# Altium PCB FruitBox_LED.PcbDoc
Units mm, origin at the board's own origin, x right, y up, seen from the top; angles counter-clockwise.
Board outline 79.93 x 79.95 mm, 2 copper layers (Top Layer, Bottom Layer), stack 1.534 mm thick; 64 components, 53 nets, 188 pads, 240 vias.
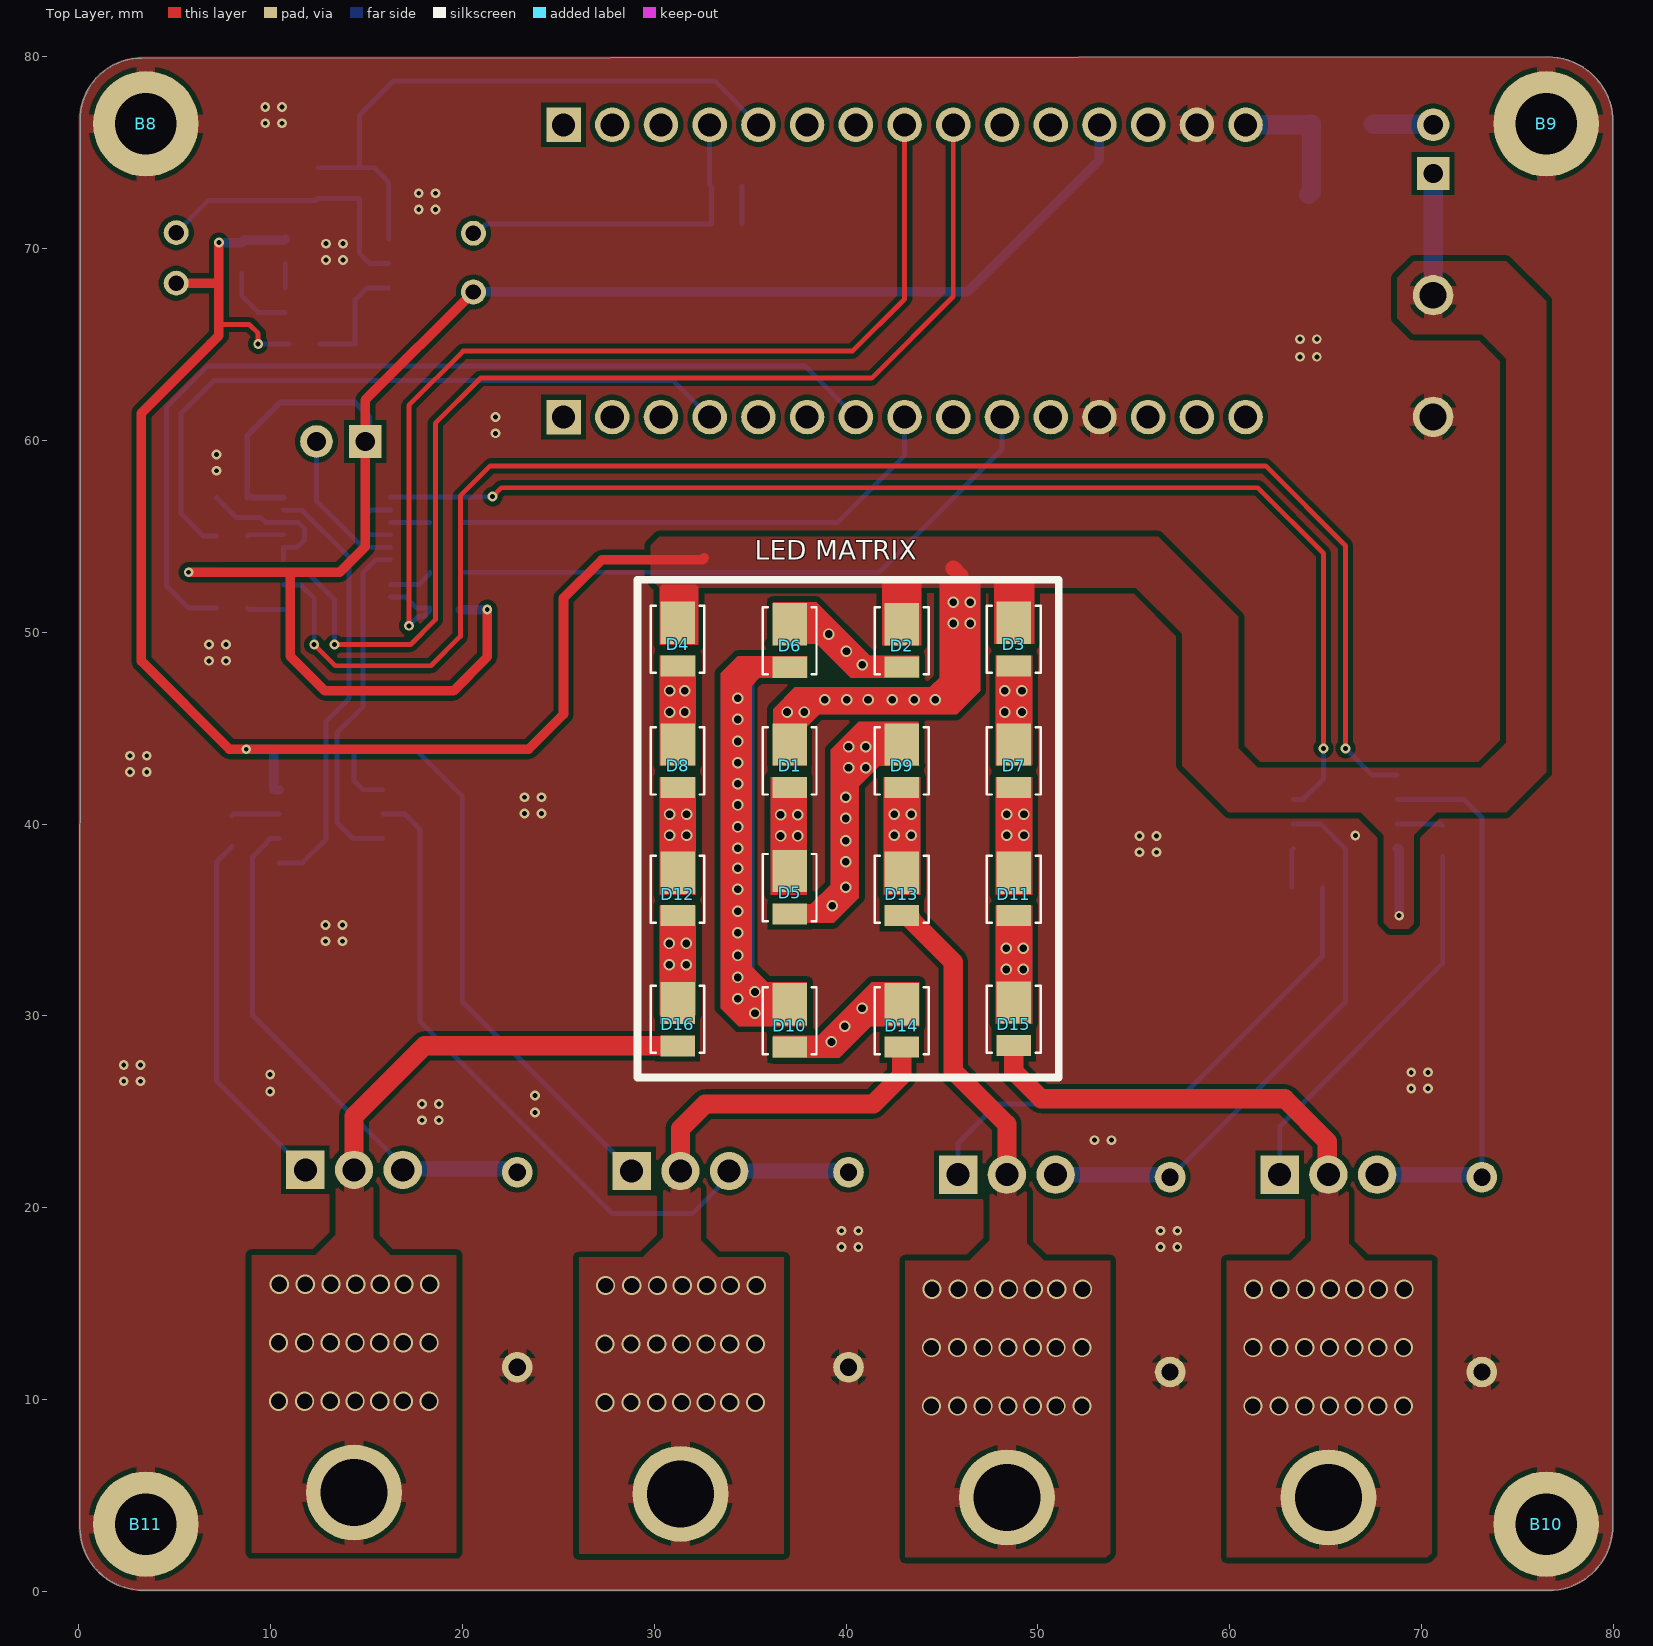
[diagram p0: Top Layer view]
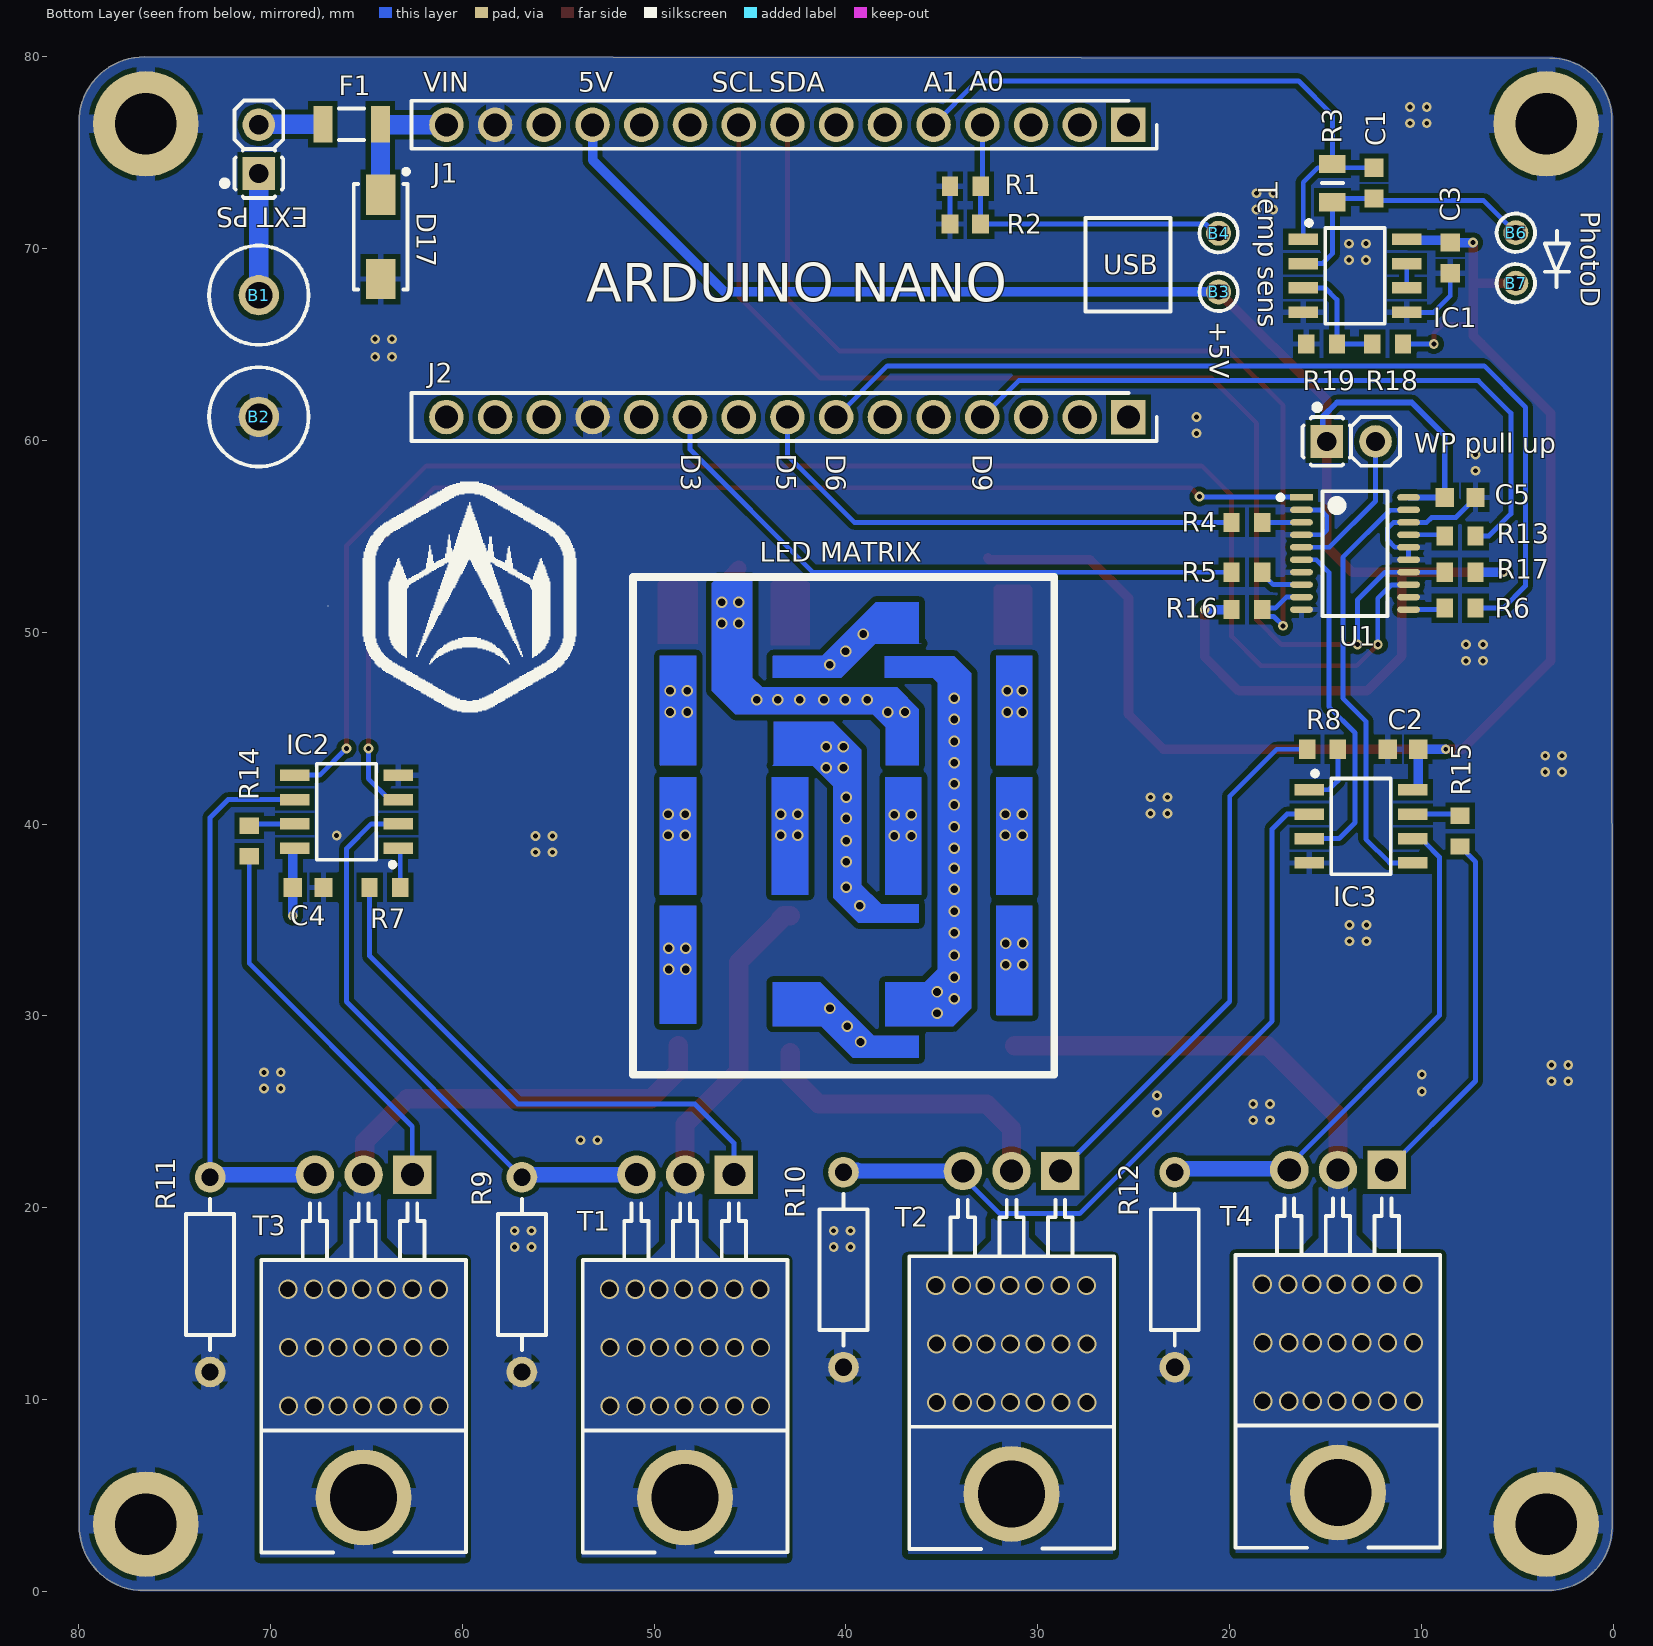
[diagram p1: Bottom Layer view, seen from below]
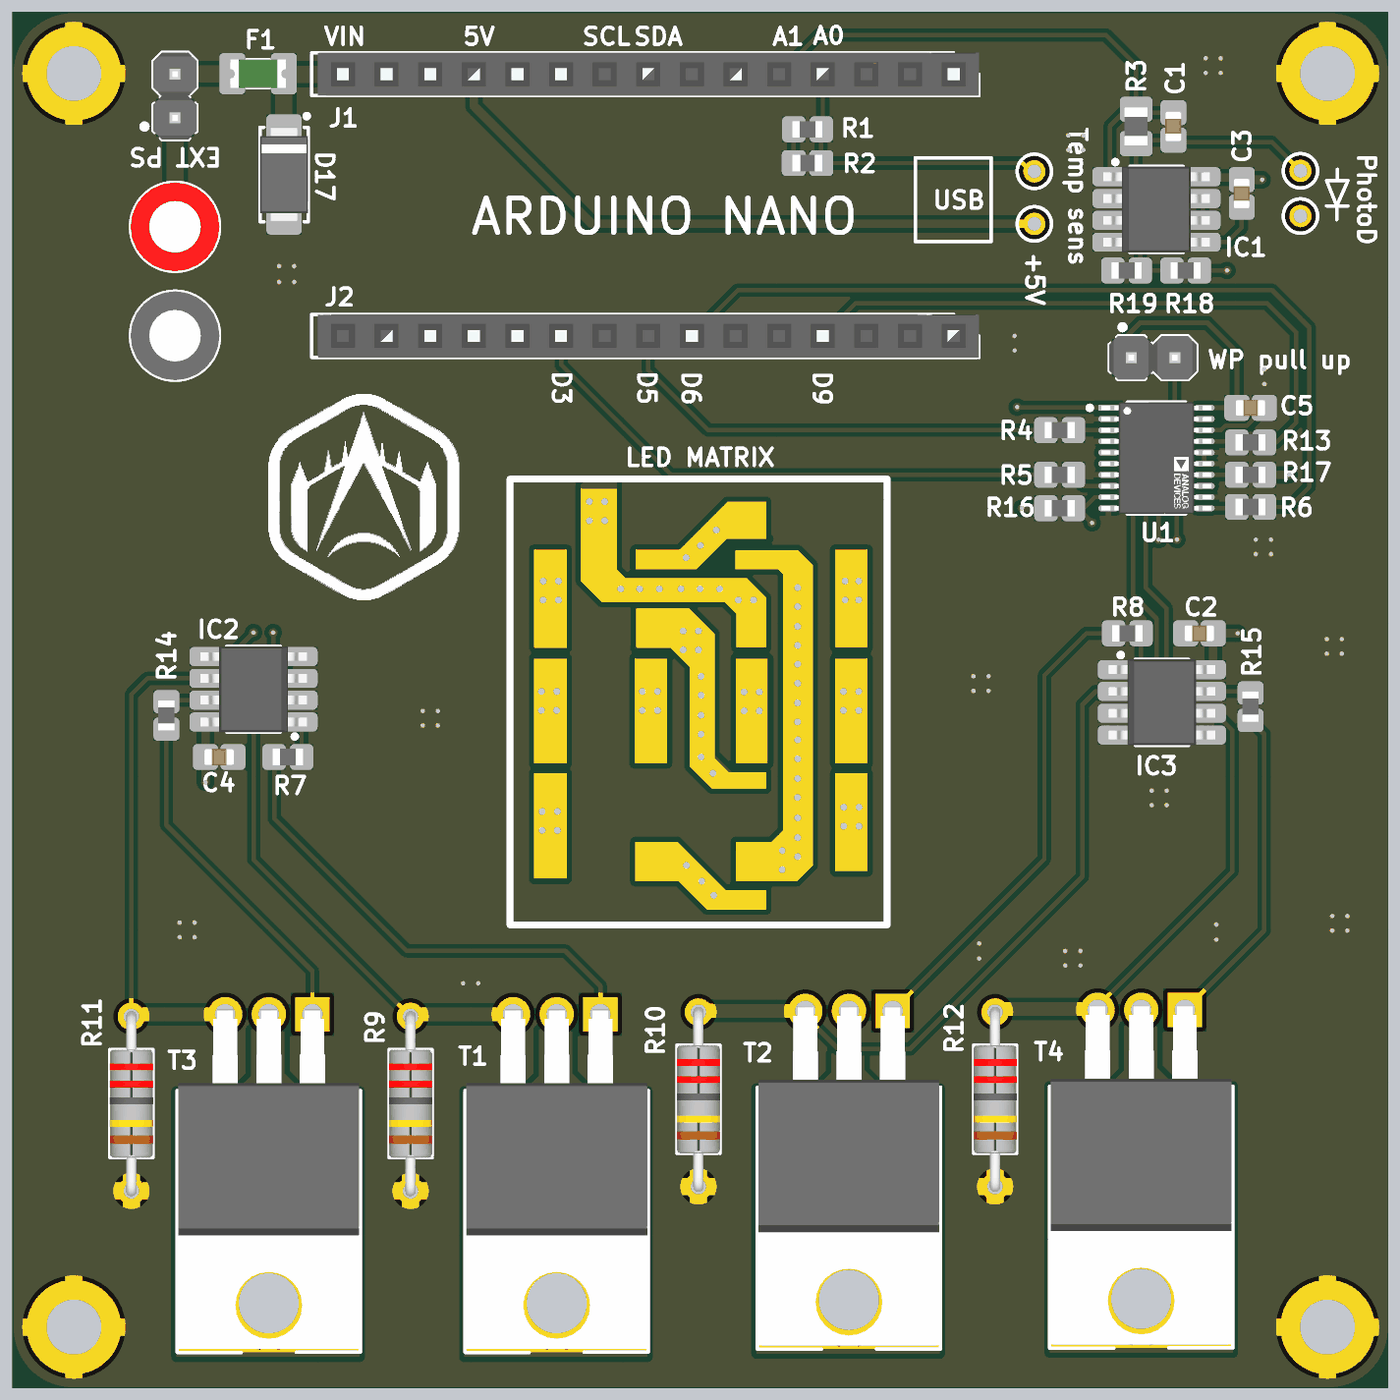
[diagram p2: 3D render of the assembled board from below, using the file's embedded part models]

## Layer stack, top to bottom
Top Solder: solder mask 0.0127, Solder Resist, Dk 3.3
Top Layer: signal copper 0.0178
Dielectric1: core 1.4986, FR-4, Dk 4.3
Bottom Layer: signal copper 0.0178
Bottom Solder: solder mask 0.0127, Solder Resist, Dk 3.3

## Board outline
0.059,3.363 0.066,76.679 cw(c3.292,76.708) 3.321,79.934 76.558,79.993 cw(c76.588,76.597) 79.984,76.566 79.976,3.412 cw(c76.634,3.382) 76.605,0.041 3.371,0.05 cw(c3.342,3.333)

## Design rules (kind name [scope] priority, off if disabled: settings)
Clearance [All] p1: gap=0.254 ignorepadtopadclearanceinfootprint=FALSE except(0.3: Fill-Fill Fill-Poly Fill-Region Poly-Poly Poly-Region Region-Region)
DiffPairsRouting [All] p1: maxlimit=0.254 minlimit=0.254 mostfreqgap=0.254 toplayer_minwidth=0.254 toplayer_maxwidth=0.254 toplayer_prefwidth=0.254 bottomlayer_minwidth=0.254 bottomlayer_maxwidth=0.254 bottomlayer_prefwidth=0.254 maxuncoupledlength=12.7
HoleSize [All] p1: absolutevalues=TRUE maxlimit=7.62 minlimit=0.254 maxpercent=80.000 minpercent=20.000
MinimumAnnularRing [All] p1: minimumring=0.254
PasteMaskExpansion [All] p1: expansion=0.254
PlaneClearance [All] p1: clearance=0.4
PlaneConnect [All] p1: pad.planeconnectstyle=Relief pad.reliefexpansion=0.508 pad.reliefentries=4 pad.reliefconductorwidth=0.254 pad.reliefairgap=0.254 via.planeconnectstyle=Direct via.reliefexpansion=0.508 via.reliefentries=4 via.reliefconductorwidth=0.254 via.reliefairgap=0.254
PolygonConnect [All] p1: thpad.connectstyle=Relief thpad.reliefconductorwidth=1 thpad.reliefentries=4 thpad.polygonreliefangle="90 Angle" thpad.airgapwidth=0.254 smdpad.connectstyle=Relief smdpad.reliefconductorwidth=0.3 smdpad.reliefentries=4 smdpad.polygonreliefangle="90 Angle" smdpad.airgapwidth=0.254 via.connectstyle=Direct via.reliefconductorwidth=0.254 via.reliefentries=4 via.polygonreliefangle="90 Angle" via.airgapwidth=0.254
RoomDefinition FruitBox_LED [InComponentClass('FruitBox_LED')] p1: confinementstyle=ConfineIn formatcopy=TRUE lockcomponents=FALSE outline -189.586,-112.446 -138.786,-112.446 -138.786,-87.046 -189.586,-87.046
RoutingVias [All] p1: holewidth=0.254 width=0.508 viastyle="Through Hole" minholewidth=0.254 minwidth=0.508 maxholewidth=0.254 maxwidth=0.508
SMDNeckDown [All] p1: percent=100.000
SilkToSolderMaskClearance SilkscreenOverComponentPads [IsPad] p1: minsilkscreentomaskgap=0.254 clearancetoexposedcopper=TRUE
SolderMaskExpansion [All] p1: expansion=0.254 istentingtop=FALSE
Width [All] p1: maxlimit=1 minlimit=0.254 preferedwidth=0.5
24 further rules are at their usual default settings.

## Components (designator, comment, footprint, x,y, rotation, side; value= is the part's Value field where it differs from the comment)
B1 "Banana" CINCH_105-2202-201 70.612,67.568 r270 bottom
B2 "Banana" CINCH_105-2203-201 70.612,61.226 r270 bottom
B3 "Plated Hole" c130h80 20.574,67.739 r180 bottom
B4 "Plated Hole" c130h80 20.574,70.798 r270 bottom
B6 "Plated Hole" c130h80 5.08,70.828 r90 bottom
B7 "Plated Hole" c130h80 5.08,68.195 r90 bottom
B8 "Plated Hole" MTG320_550 3.5,76.5 r0 top
B9 "Plated Hole" MTG320_550 76.5,76.5 r0 top
B10 "Plated Hole" MTG320_550 76.5,3.5 r0 top
B11 "Plated Hole" MTG320_550 3.5,3.5 r0 top
C1 "100nF" CAPC1608X87N 12.474,73.415 r90 bottom
C2 "100nF" CAPC1608X87N 10.962,43.899 r0 bottom
C3 "100nF" CAPC1608X87N 8.496,69.511 r270 bottom
C4 "100nF" CAPC1608X87N 68.04,36.695 r180 bottom
C5 "100nF" CAPC1608X87N 7.982,57.027 r180 bottom
D1 "JB2835BWT" JB2835BWT 37.064,42.754 r270 top
D2 "JB2835BWT" JB2835BWT 42.906,49.022 r270 top
D3 "JB2835BWT" JB2835BWT 48.748,49.093 r270 top
D4 "JB2835BWT" JB2835BWT 31.222,49.093 r270 top
D5 "JB2835BWT" JB2835BWT 37.064,36.15 r270 top
D6 "JB2835BWT" JB2835BWT 37.064,49.017 r270 top
D7 "JB2835BWT" JB2835BWT 48.748,42.754 r270 top
D8 "JB2835BWT" JB2835BWT 31.222,42.754 r270 top
D9 "JB2835BWT" JB2835BWT 42.906,42.754 r270 top
D10 "JB2835BWT" JB2835BWT 37.064,29.21 r270 top
D11 "JB2835BWT" JB2835BWT 48.748,36.066 r270 top
D12 "JB2835BWT" JB2835BWT 31.222,36.066 r270 top
D13 "JB2835BWT" JB2835BWT 42.906,36.066 r270 top
D14 "JB2835BWT" JB2835BWT 42.906,29.21 r270 top
D15 "JB2835BWT" JB2835BWT 48.748,29.292 r270 top
D16 "JB2835BWT" JB2835BWT 31.222,29.281 r270 top
D17 "BZG03C18" DIOM5326X230N 64.262,70.612 r270 bottom
"EXT PS" "Header 2" HARWIN_M20-9990246 70.612,73.914 r90 bottom (schematic designator W1)
F1 "250mA-60V" FUSR_BEL_0ZCJ0010FF2E 65.775,76.483 r180 bottom
IC1 "LM358AD" SOIC127P600X175-8N 13.462,68.58 r180 bottom
IC2 "LM358AD" SOIC127P600X175-8N 66.04,40.64 r0 bottom
IC3 "LM358AD" SOIC127P600X175-8N 13.148,39.878 r180 bottom
J1 "M20-7821546" M20-7821546 25.273,76.454 r0 bottom
J2 "M20-7821546" M20-7821546 25.273,61.214 r0 bottom
R1 "200" RESC1608X64N 33.782,73.248 r180 bottom
R2 "2k" RESC1608X55N 33.782,71.279 r180 bottom
R3 "51k" RESC2012X60N 14.646,73.415 r90 bottom
R4 "10k" RESC1608X64N 19.099,55.727 r180 bottom
R5 "10k" RESC1608X64N 19.099,53.127 r180 bottom
R6 "10k" RESC1608X64N 7.982,51.256 r0 bottom
R7 "200" RESC1608X64N 64.04,36.695 r0 bottom
R8 "200" RESC1608X64N 15.159,43.899 r0 bottom
R9 "2" RES1016-630X250 56.896,16.51 r90 bottom
R10 "2" RES1016-630X250 40.132,16.764 r90 bottom
R11 "2" RES1016-630X250 73.152,16.51 r90 bottom
R12 "2" RES1016-630X250 22.86,16.764 r90 bottom
R13 "10k" RESC1608X64N 7.982,55.015 r0 bottom
R14 "200" RESC1608X64N 71.112,39.116 r270 bottom
R15 "200" RESC1608X64N 7.982,39.624 r270 bottom
R16 "10k" RESC1608X64N 19.099,51.177 r0 bottom
R17 "10k" RESC1608X64N 7.982,53.127 r180 bottom
R18 "10k" RESC1608X64N 11.762,65.024 r0 bottom
R19 "10k" RESC1608X64N 15.205,65.024 r180 bottom
T1 "IRF610PBF" TO-220-H 48.387,21.717 r0 bottom
T2 "IRF610PBF" TO-220-H 31.369,21.907 r0 bottom
T3 "IRF610PBF" TO-220-H 65.151,21.717 r0 bottom
T4 "IRF610PBF" TO-220-H 14.351,21.971 r0 bottom
U1 "AD5253BRUZ50" FP-RU-20-IPC_C 13.462,54.102 r180 bottom
"WP pull up" "Header 2" HARWIN_M20-9990246 14.934,59.944 r180 bottom (schematic designator W2)

## Footprints (in the part's own frame and the unit in brackets; to place one, negate y for a bottom-side part, rotate by r counter-clockwise, add the part's x,y. Pads: shape width x height; smd on the part's side, far side on the other; paste and mask are expansions set on the pad)
c130h80 [mm] "Plated Through Hole: Hole Dia.=0.8mm Pad Dia.=1.30mm, , IPC-7251 Level C"
  round 1.3 hole 0.8: 1(0,0)
  silkscreen extent -1,-1 1,1
CAPC1608X87N [mm] "Chip Capacitor, Body 1.6x0.8mm IPC Medium Density"
  rect 0.95x1 smd: 1(-0.8,0) 2(0.8,0)
  body extent -0.87,-0.47 0.88,0.48, height 0.87
CINCH_105-2202-201 [mm] "Red Tip Jack, Vertical For Banana 2mm"
  round 2.1 hole 1.4: 1(0,0)
  silkscreen extent -2.59,-2.59 2.59,2.59, body extent -2.59,-2.59 2.59,2.59, height 8.26
CINCH_105-2203-201 [mm] "Black Tip Jack, Vertical For Banana 2mm"
  round 2.1 hole 1.4: 1(0,0)
  silkscreen extent -2.59,-2.59 2.59,2.59, body extent -2.59,-2.59 2.59,2.59, height 8.26
DIOM5326X230N [mm] "DO-214-AC/SMA Molded Diode, Body 5.3x2.6mm, IPC Medium Density"
  rect 2.1x1.55 smd: 1(-2.2,0) 2(2.2,0)
  silkscreen extent -3.52,-1.4 2.75,1.45, body extent -2.75,-1.4 2.75,1.4, height 2.3
FP-RU-20-IPC_C [mm]
  rect 1.188x0.341 smd paste+0 mask+0: 1(-2.791,2.925)
  rrect100% 1.188x0.341 smd paste+0 mask+0: 2(-2.791,2.275) 3(-2.791,1.625) 4(-2.791,0.975) 5(-2.791,0.325) 6(-2.791,-0.325) 7(-2.791,-0.975) 8(-2.791,-1.625) 9(-2.791,-2.275) 10(-2.791,-2.925) 11(2.791,-2.925) 12(2.791,-2.275) 13(2.791,-1.625) 14(2.791,-0.975) 15(2.791,-0.325) 16(2.791,0.325) 17(2.791,0.975) 18(2.791,1.625) 19(2.791,2.275) 20(2.791,2.925)
  silkscreen extent -4.01,-3.25 1.7,3.25, body extent -3.2,-3.25 3.2,3.25, height 1.2
FUSR_BEL_0ZCJ0010FF2E [mm] "1206 (3216mm), Body 3.25 x 1.65mm, Surface Mount PTC Resettable Fuse,  OZCJ Series"
  rect 1x1.9 smd: 1(-1.5,0) 2(1.5,0)
  silkscreen extent -0.65,-0.82 0.65,0.82, body extent -1.62,-0.82 1.63,0.83, height 0.85
HARWIN_M20-9990246 [mm] "2 Contacts, Pitch 2.54mm - Male Vertical Single row Pc tail"
  rect 1.7x1.7 hole 1: 1(0,0)
  round 1.7 hole 1: 2(2.54,0)
  silkscreen extent -1.27,-1.27 3.81,1.93, body extent -1.27,-1.27 3.81,1.27, height 8.64
JB2835BWT [mm]
  rect 1.1x1.8 smd: 1(0.845,0)
  rect 2.2x1.8 smd: 2(-1.395,0)
  silkscreen extent -2.29,-1.4 1.21,1.4, body extent -2.29,-1.4 1.21,1.4, height 0.3
M20-7821546 [mm]
  rect 1.8x1.8 / inner round 1.8 / far side rect 1.8x1.8 hole 1.2: 1(0,0)
  round 1.8 hole 1.2: 2(2.54,0) 3(5.08,0) 4(7.62,0) 5(10.16,0) 6(12.7,0) 7(15.24,0) 8(17.78,0) 9(20.32,0) 10(22.86,0) 11(25.4,0) 12(27.94,0) 13(30.48,0) 14(33.02,0) 15(35.56,0)
  silkscreen extent -1.47,-1.25 37.38,1.25, body extent -1.47,-1.25 37.03,1.25, height 8.65
MTG320_550 [mm] "Plated Through Hole: Hole Dia.=3.2mm Pad Dia.=5.5mm"
  round 5.5 hole 3.2: 1(0,0)
RES1016-630X250 [mm] "Resistor, Axial, Pad spacing 10.16 mm - Body Lengh 6.3mm X Body Diameter 2.5mm"
  round 1.6 hole 0.9: 1(-5.08,0) 2(5.08,0)
  silkscreen extent -3.95,-1.25 3.95,1.25, body extent -5.38,-1.27 5.38,1.26, height 2.5
RESC1608X55N [mm] "Chip Resistor, EIA 0603, Metric 1608, Body 1.6x0.8mm, IPC Medium Density"
  rect 0.9x1 smd: 1(-0.8,0) 2(0.8,0)
  body extent -0.87,-0.47 0.88,0.48, height 0.55
RESC1608X64N [mm] "Chip Resistor, EIA 0603, Metric 1608, Body 1.6x0.8mm, IPC Medium Density"
  rect 0.85x1 smd: 1(-0.8,0) 2(0.8,0)
  body extent -0.87,-0.47 0.88,0.48, height 0.64
RESC2012X60N [mm] "Chip Resistor, EIA 0805, Metric 2012, Body 2.0x1.2mm, IPC Medium Density"
  rect 0.95x1.4 smd: 1(-1,0) 2(1,0)
  silkscreen extent 0,-0.55 0,0.55, body extent -1.1,-0.67 1.1,0.68, height 0.6
SOIC127P600X175-8N [mm] "SOIC 8, Pitch 1.27mm - Body 4x5mm, IPC Medium Density"
  rect 1.55x0.6 smd: 1(-2.7,1.905) 2(-2.7,0.635) 3(-2.7,-0.635) 4(-2.7,-1.905) 5(2.7,-1.905) 6(2.7,-0.635) 7(2.7,0.635) 8(2.7,1.905)
  silkscreen extent -2.53,-2.5 1.55,2.88, body extent -3.1,-2.5 3.1,2.5, height 1.75
TO-220-H [mm] "TO-220 3-Terminal + Tab - Horizontal Mount"
  rect 2x2 hole 1.2: 1(-2.54,0)
  round 2 hole 1.2: 2(0,0) 3(2.54,0)
  round 5 hole 3.5: 4(0,16.828)
  silkscreen extent -5.33,1.5 5.33,19.7, body extent -5.27,-0.28 5.27,19.49, height 4.7

## Part data
B1: library part CINCH_105-2202-201, "Single Terminal Socket", Manufacturer="CINCH CONNECTIVITY", Manufacturer Part Number=105-2202-201, Author="CERN DEM MR", Component Type=Standard, ComponentHeight=8.26mm, CreateDate=23-Feb-16, Family=Banana, HelpURL=\\cern.ch\dfs\Applications\Altium\Datasheets\CINCH_105-22XX-201.pdf, LatestRevisionDate=23-Feb-16, Mounted=Yes, Part Description="Red Tip Jack, Vertical For Banana 2mm", Part Number=CINCH_105-2202-201, Pin Count=1, PressFit=No, Sense=No, SMD=No, Socket=No, Status=None
B2: library part CINCH_105-2203-201, "Single Terminal Socket", Manufacturer="CINCH CONNECTIVITY", Manufacturer Part Number=105-2203-201, Author="CERN DEM MR", Component Type=Standard, ComponentHeight=8.26mm, CreateDate=23-Feb-16, Family=Banana, HelpURL=\\cern.ch\dfs\Applications\Altium\Datasheets\CINCH_105-22XX-201.pdf, LatestRevisionDate=23-Feb-16, Mounted=Yes, Part Description="Black Tip Jack, Vertical For Banana 2mm", Part Number=CINCH_105-2203-201, Pin Count=1, PressFit=No, Sense=No, SMD=No, Socket=No, Status=None
B3 B4 B6 B7: library part PLATED_HOLE0.8_PAD1.3, "Single Terminal Socket", Author="CERN DEM JLC", Component Type="Standard (No BOM)", ComponentHeight=0mm, CreateDate=30-Oct-08, Family="Plated Hole", HelpURL=Undefined, LatestRevisionDate=30-Oct-08, Mounted=No, PackageDescription="Plated Through Hole: Hole Dia.=0.8mm Pad Dia.=1.3mm, IPC-7251 Level C", Part Description="Plated Through Hole: Hole Dia.=0.8mm Pad Dia.=1.3mm, IPC-7251 Level C", Part Number=PLATED_HOLE0.8_PAD1.3, Pin Count=1, Sense=No, SMD=No, Socket=No, Status=None
B8 B9 B10 B11: library part PLATED_HOLE3.2_PAD5.5, "Single Terminal Socket", Author="CERN DEM JMW", Component Type="Standard (No BOM)", ComponentHeight=0mm, CreateDate=01-Oct-12, Family="Plated Hole", HelpURL=Undefined, LatestRevisionDate=01-Oct-12, Mounted=No, PackageDescription="Plated Through Hole: Hole Dia.=3.2mm Pad Dia.=5.5mm", Part Description="Plated Through Hole: Hole Dia.=3.2mm Pad Dia.=5.5mm", Part Number=PLATED_HOLE3.2_PAD5.5, Pin Count=1, Sense=No, SMD=No, Socket=No, Status=None
C1 C2 C3 C4 C5: library part CC0603_100NF_50V_10%_X7R, "Non-polarised capacitor", Case=0603, Manufacturer=GENERIC, Manufacturer1 ComponentHeight=0.87mm, Manufacturer1 Example=PHYCOMP, Manufacturer1 Part Number=223858615649, Tolerance=±10%, Voltage=50V, Author="CERN DEM JLC", Component Type=Standard, CreateDate=03-Dec-07, HelpURL=\\cern.ch\dfs\Applications\Altium\Datasheets\CC0603_X7R_PHYCOMP.pdf, LatestRevisionDate=03-Dec-07, Manufacturer Part Number=CC0603_100NF_50V_10%_X7R, Mounted=Yes, Part Description="SMD Multilayer Chip Ceramic Capacitor", Part Number=CC0603_100NF_50V_10%_X7R, Pin Count=2, Sense=No, SMD=Yes, Socket=No, Status=Preferred, TC=X7R
D1 D2 D3 D4 D5 D6 D7 D8 D9 D10 D11 D12 D13 D14 D15 D16: library part JB2835BWT-G-U35GA0000
D17: "Zener Diode", Case=DO-214AC, Manufacturer="VISHAY SEMICONDUCTORS", Power=1.25W, Voltage=18V, Author="CERN DEM JLC", Bonding=No, Component Type=Standard, ComponentHeight=2.3mm, CreateDate=02-Jun-08, Device=BZG03C18, HelpURL=\\cern.ch\dfs\Applications\Altium\Datasheets\BZG03C.pdf, LatestRevisionDate=02-Jun-08, Manufacturer Part Number=BZG03C18, Mounted=Yes, PackageDescription="DO-214-AC/SMA Molded Diode, Body 5.3x2.6mm, IPC Medium Density", Part Description="Voltage Regulator Diode", Part Number=BZG03C18, Pin Count=2, PressFit=No, Sense=No, SMD=Yes, Socket=No
"EXT PS" "WP pull up": library part HARWIN_M20-9990246, "2 Mini Wire-Wrap Contact Strip Header", Manufacturer=HARWIN, Manufacturer Part Number=M20-9990246, Author="CERN DEM JLC", Component Type=Standard, ComponentHeight=8.68mm, CreateDate=01-Jun-11, Family="Header 2", HelpURL=\\cern.ch\dfs\Applications\Altium\Datasheets\HARWIN_M20-9990246.pdf, LatestRevisionDate=01-Jun-11, Mounted=Yes, Part Description="2 Contacts SIL Vertical Pin Header, Pitch 2.54mm, Mating Height 6.1mm, Insulator 2.54mm", Part Number=HARWIN_M20-9990246, Pin Count=2, PressFit=No, Sense=No, SMD=No, Socket=No, Status=None
F1: library part FUSR1206_BEL_0ZCJ0010FF2E, "Fuse", Manufacturer=BEL, Manufacturer Part Number=0ZCJ0010FF2E, Author="CERN DEM BR", Component Type=Standard, ComponentHeight=0.85mm, CreateDate=20-May-19, Family="Fuses Resettable", HelpURL=\\cern.ch\dfs\Applications\Altium\Datasheets\FUSR_BEL_0ZCJ.pdf, LatestRevisionDate=20-May-19, Mounted=Yes, PackageDescription="1206 (3216mm), Body 3.25 x 1.65mm, Surface Mount PTC Resettable Fuse,  OZCJ Series", Part Description="Surface Mount PTC Resettable Fuse,  OZCJ Series", Part Number=FUSR1206_BEL_0ZCJ0010FF2E, Pin Count=2, PressFit=No, Sense=No, SMD=Yes, Socket=No
IC1 IC2 IC3: "Dual Operational Amplifier", Case=SOIC8, Manufacturer="TEXAS INSTRUMENTS", Author="CERN DEM JLC", Bonding=No, Component Type=Standard, ComponentHeight=1.75mm, CreateDate=02-Dec-08, Device=LM358AD, HelpURL=\\cern.ch\dfs\Applications\Altium\Datasheets\LM358AD.pdf, LatestRevisionDate=13-Apr-10, Manufacturer Part Number=LM358AD, Mounted=Yes, PackageDescription="SOIC 8, Pitch 1.27mm - Body 4x5mm, IPC Medium Density", Part Description="Dual Operational Amplifier", Part Number=LM358AD, Pin Count=8, PressFit=No, Sense=No, SMD=Yes, Socket=No
R1 R7 R8 R14 R15: library part R0603_200R_0.1%_0.1W_25PPM, "Resistor - 0.1%", Case=0603, Manufacturer=GENERIC, Manufacturer1 ComponentHeight=0.55mm, Manufacturer1 Example=PANASONIC, Manufacturer1 Part Number=ERA3AEB201V, Power=0.1W, Tolerance=±0.1%, Author="CERN DEM JLC", Component Type=Standard, CreateDate=12-Jan-17, HelpURL=\\cern.ch\dfs\Applications\Altium\Datasheets\R0603_PANASONIC_ERA.pdf, LatestRevisionDate=12-Jan-17, Manufacturer Part Number=R0603_200R_0.1%_0.1W_25PPM, Mounted=Yes, Part Description="Thin Film Chip Resistor", Part Number=R0603_200R_0.1%_0.1W_25PPM, Pin Count=2, PressFit=No, Sense=No, SMD=Yes, Socket=No, Status="Not Recommended", TC=±25ppm/°C
R2: library part R0603_2K_1%_0.1W_100PPM, "Resistor - 1%", Case=0603, Manufacturer=GENERIC, Manufacturer1 ComponentHeight=0.55mm, Manufacturer1 Example="NIC COMPONENT", Manufacturer1 Part Number=NRC06F2001TRF, Power=0.1W, Tolerance=±1%, Author="CERN DEM JLC", Component Type=Standard, CreateDate=03-Dec-07, HelpURL=\\cern.ch\dfs\Applications\Altium\Datasheets\R0603_NIC_NRC.pdf, LatestRevisionDate=13-Mar-08, Manufacturer Part Number=R0603_2K_1%_0.1W_100PPM, Mounted=Yes, Part Description="General Purpose Thick Film Chip Resistor", Part Number=R0603_2K_1%_0.1W_100PPM, Pin Count=2, PressFit=No, Sense=No, SMD=Yes, Socket=No, Status=Preferred, TC=±100ppm/°C
R3: library part R0805_51K_1%_0.125W_100PPM, "Resistor - 1%", Case=0805, Manufacturer=GENERIC, Manufacturer1 ComponentHeight=0.6mm, Manufacturer1 Example="NIC COMPONENT", Manufacturer1 Part Number=NRC10F5102TRF, Power=0.125W, Tolerance=±1%, Author="CERN DEM JLC", Component Type=Standard, CreateDate=03-Dec-07, HelpURL=\\cern.ch\dfs\Applications\Altium\Datasheets\R0805_NIC_NRC.pdf, LatestRevisionDate=13-Mar-08, Manufacturer Part Number=R0805_51K_1%_0.125W_100PPM, Mounted=Yes, Part Description="General Purpose Thick Film Chip Resistor", Part Number=R0805_51K_1%_0.125W_100PPM, Pin Count=2, PressFit=No, Sense=No, SMD=Yes, Socket=No, Status=Preferred, TC=±100ppm/°C
R4 R5 R6 R13 R16 R17 R18 R19: library part R0603_10K_0.1%_0.1W_25PPM, "Resistor - 0.1%", Case=0603, Manufacturer=GENERIC, Manufacturer1 ComponentHeight=0.55mm, Manufacturer1 Example=PANASONIC, Manufacturer1 Part Number=ERA3AEB103V, Power=0.1W, Tolerance=±0.1%, Author="CERN DEM JMW", Component Type=Standard, CreateDate=09-Nov-15, HelpURL=\\cern.ch\dfs\Applications\Altium\Datasheets\R0603_PANASONIC_ERA.pdf, LatestRevisionDate=11-Jan-17, Manufacturer Part Number=R0603_10K_0.1%_0.1W_25PPM, Mounted=Yes, Part Description="Thin Film Chip Resistor", Part Number=R0603_10K_0.1%_0.1W_25PPM, Pin Count=2, PressFit=No, Sense=No, SMD=Yes, Socket=No, Status="Not Recommended", TC=±25ppm/°C
R9 R10 R11 R12: library part RMF_2R_1%_0.6W_50PPM_1016-630X250, "Resistor - 1%", Case="LS10.16 L6.3 x D2.5", Manufacturer=GENERIC, Manufacturer1 ComponentHeight=2.5mm, Manufacturer1 Example="VISHAY BEYSCHLAG", Manufacturer1 Part Number=MBB02070C2008FCT00, Power=0.6W, Tolerance=±1%, Author="CERN DEM JLC", Component Type=Standard, ComponentHeight=2.5mm, CreateDate=04-Dec-07, HelpURL=\\cern.ch\dfs\Applications\Altium\Datasheets\RMF_VISHAY_MBB0207.pdf, LatestRevisionDate=07-Apr-08, Manufacturer Part Number=RMF_2R_1%_0.6W_50PPM_1016-630X250, Mounted=Yes, Part Description="Leaded Metal Film Resistor", Part Number=RMF_2R_1%_0.6W_50PPM_1016-630X250, Pin Count=2, PressFit=No, Sense=No, SMD=No, Socket=No, Status=Preferred, TC=±50ppm/°C
T1 T2 T3 T4: library part IRF610PBF_h, "N-CHANNEL MOSFET WITH DIODE AND 2 DRAIN", Case=TO-220, Manufacturer="VISHAY SILICONIX", Author="CERN DEM JLC", Bonding=No, Component Type=Standard, ComponentHeight=4.69mm, CreateDate=29-May-18, Device=IRF610PBF, HelpURL=\\cern.ch\dfs\Applications\Altium\Datasheets\IRF610PBF.pdf, LatestRevisionDate=29-May-18, Manufacturer Part Number=IRF610PBF, Mounted=Yes, PackageDescription="TO-220 3-Terminal + Tab - Horizontal", Part Description="200V 3.3A N-Channel Power MOSFET", Part Number=IRF610PBF_h, Pin Count=4, PressFit=No, Sense=No, SMD=No, Socket=No
U1: library part CMP-09083-000126-1, "IC DGTL POT 50KOHM 64TAP 20TSSOP", Case/Package=TSSOP, Dual Supply Voltage=2.5V, Frequency=400kHz, Max Dual Supply Voltage=2.75V, Max Operating Temperature=85°C, Max Supply Current=5uA, Max Supply Voltage=5.5V, Min Dual Supply Voltage=2.25V, Min Operating Temperature=-40°C, Min Supply Voltage=2.7V, Nominal Supply Current=3uA, Package Quantity=75, Resistance=50kR, Resistance Tolerance=20%, Temperature Coefficient=300ppm/°C, -3db Bandwidth=4MHz, Contact Plating=Tin, Height=1.05mm, Interface=I2C, Lead Free="Contains Lead", Length=6.5mm, Memory Type=Non-Volatile, Mount="Surface Mount", Number of Channels=4, Number of Circuits=4, Number of Elements=4, Number of Pins=20, Number of Positions=64, Number of Taps=64, Operating Supply Current=3uA, Operating Supply Voltage=2.75V, Packaging=Rail/Tube, Quiescent Current=5uA, REACH SVHC="No SVHC", RoHS Compliant=Yes, Series=-, Supply Current=3uA, Taper=Linear, Termination=SMD/SMT, Tolerance=20%, Width=4.4mm

## Via types
v1: diameter 1, hole 0.8, Top Layer to Bottom Layer, tented both sides, 84 vias
v2: diameter 0.508, hole 0.254, Top Layer to Bottom Layer, tented both sides, 79 vias
v3: diameter 0.6, hole 0.4, Top Layer to Bottom Layer, tented both sides, 77 vias

## Nets (pads, with @x,y where several pads share a name; then routed paths per layer and width w, separated by ;. In a path a pad name is that pad's centre, name@x,y a point inside that pad or via, vN(x,y) a via of type N, cw(c..) or ccw(c..) an arc to the next point about the centre after c; other vN are vias at no path point)
"Arduino D3": J2.10 R5.1 | length 32.6
  Bottom Layer w0.254: R5.1 41.731,53.127 48.133,59.529 J2.10
"Arduino D5": J2.8 R4.1 | length 26.6
  Bottom Layer w0.254: R4.1 39.56,55.727 43.053,59.22 J2.8
"Arduino D6": J2.7 R6.1 | length 50.3
  Bottom Layer w0.254: R6.1 5.73,51.256 4.572,52.414 4.572,61.722 6.731,63.881 37.846,63.881 J2.7
"Arduino D9": J2.4 R13.1 | length 36.6
  Bottom Layer w0.254: R13.1 6.485,55.015 5.334,56.166 5.334,61.419 7.034,63.119 30.988,63.119 J2.4
Arduino_5V: "WP pull up.1" B3.1 C5.1 J1.12 R16.2 R17.2 U1.20 | length 97.9
  Top Layer w0.5: v2(5.73,53.127) 11.033,53.127 ; B3.1 14.934,62.099 14.934,59.944 14.934,54.449 13.612,53.127 11.033,53.127 ; v2(21.297,51.177) 21.297,48.713 19.527,46.942 12.827,46.942 11.033,48.736 11.033,53.127
  Bottom Layer w0.3: C5.1 8.782,60.255 10.503,61.976 14.405,61.976 15.146,61.235 15.146,60.156 14.934,59.944 ; C5.1@8.971,57.112 9.056,57.027 U1.20
  Bottom Layer w0.5: v2(5.73,53.127) R17.2 ; R16.2 v2(21.297,51.177) ; B3.1 46.343,67.739 53.213,74.609 J1.12
Arduino_A0: B4.1 J1.4 R1.2 R2.2 | length 17.8
  Bottom Layer w0.254: B4.1 20.765,70.798 21.246,71.279 R2.2 R1.2 32.893,73.337 J1.4
Arduino_A1: C1.2 IC1.1 J1.5 R3.2 | length 32.2
  Bottom Layer w0.254: C1.2 R3.2@14.646,74.215 ; IC1.1 16.162,73.449 15.396,74.215 R3.2@14.646,74.215 ; J1.5 33.147,78.74 16.409,78.74 14.646,76.977 R3.2@14.646,74.215
GND: B2.1 B8.1 B9.1 B10.1 B11.1 C2.2 C3.2 C4.2 C5.2 D17.2 IC1.4 IC1.5 IC2.4 IC3.4 J1.14 J2.12 R1.1 R2.1 R9.1 R10.1 R11.1 R12.1 R19.1 U1.2 U1.4 U1.7 U1.10 U1.12 U1.15 U1.16 U1.18 | length 17.1
  Bottom Layer w0.254: C5.2 7.182,57.002 8.207,55.977 9.471,55.977 9.721,55.727 U1.18 10.687,55.71 11.466,55.71 11.765,55.411 11.765,54.805 11.387,54.427 U1.16 U1.15 ; C3.2 8.496,67.531 9.352,66.675 IC1.5 ; U1.2@16.253,56.376 15.259,56.376 14.934,56.052 14.934,55.322 15.179,55.077 U1.4 ; R2.1 R1.1
  other v2: 39.766,17.95 40.644,17.95 56.396,17.95 57.274,17.95 39.766,18.796 40.644,18.796 56.396,18.796 57.274,18.796 52.959,23.517 53.837,23.517 17.894,24.554 18.772,24.554 23.788,24.962 17.894,25.4 18.772,25.4 23.788,25.84 9.977,26.059 69.469,26.205 70.347,26.205 2.347,26.586 3.225,26.586 9.977,26.937 69.469,27.051 70.347,27.051 2.347,27.432 3.225,27.432 12.866,33.888 13.744,33.888 12.866,34.734 13.744,34.734 55.308,38.529 56.186,38.529 55.308,39.375 56.186,39.375 66.555,39.402 23.241,40.549 24.119,40.549 23.241,41.395 24.119,41.395 2.667,42.715 3.545,42.715 2.667,43.561 3.545,43.561 6.795,48.507 7.673,48.507 6.795,49.353 7.673,49.353 7.182,58.42 7.182,59.266 21.728,60.368 21.728,61.214 63.67,64.354 64.548,64.354 63.675,65.278 64.548,65.278 12.894,69.41 13.772,69.41 12.894,70.256 13.772,70.256 17.724,72.04 18.602,72.04 17.724,72.886 18.602,72.886 9.721,76.531 10.599,76.531 9.721,77.377 10.599,77.377
NetB6_1: B6.1 C1.1 IC1.2 R3.1 | length 14.9
  Bottom Layer w0.254: B6.1 6.75,72.498 12.357,72.498 C1.1 14.646,72.615 14.646,69.734 15.155,69.225 16.152,69.225 IC1.2
NetD1_1: D1.1 D5.2
  other v3: 36.587,39.378 37.477,39.378 36.587,40.485 37.477,40.485
NetD2_1: D2.1 D6.2
  other v3: 40.85,48.31 40.024,49.01 39.097,49.904
NetD3_1: D3.1 D7.2
  other v3: 48.285,45.835 49.175,45.835 48.285,46.942 49.175,46.942
NetD4_1: D4.1 D8.2
  other v3: 30.798,45.835 31.59,45.835 30.798,46.942 31.59,46.942
NetD5_1: D5.1 D9.2
  other v3: 39.289,35.741 39.979,36.695 39.979,38.025 39.979,39.132 39.979,40.288 39.979,41.395 40.132,42.926 41.022,42.926 40.132,44.033 41.022,44.033
NetD6_1: D6.1 D10.2
  other v3: 35.252,30.135 34.358,30.892 35.252,31.242 34.358,32 34.351,33.147 34.358,34.336 34.358,35.444 34.351,36.591 34.351,37.698 34.364,38.737 34.364,39.844 34.358,40.992 34.358,42.099 34.358,43.197 34.358,44.304 34.351,45.451 34.351,46.559
NetD7_1: D7.1 D11.2
  other v3: 48.387,39.405 49.277,39.405 48.387,40.513 49.277,40.513
NetD8_1: D8.1 D12.2
  other v3: 30.798,39.405 31.688,39.405 30.798,40.513 31.688,40.513
NetD9_1: D9.1 D13.2
  other v3: 42.516,39.405 43.406,39.405 42.516,40.513 43.406,40.513
NetD10_1: D10.1 D14.2
  other v3: 39.243,28.638 39.943,29.464 40.837,30.391
NetD11_1: D11.1 D15.2 | length 0.3
  Top Layer w0.8: D11.1@48.398,35.221 D11.1
  other v3: 48.347,32.419 49.237,32.419 48.347,33.526 49.237,33.526
NetD12_1: D12.1 D16.2
  other v3: 30.785,32.666 31.675,32.666 30.785,33.773 31.675,33.773
NetD13_1: D13.1 T1.2 T1.4 | length 16
  Top Layer w1: D13.1 43.256,35.221 43.406,35.071 43.406,34.994 45.593,32.807 45.593,27.137 48.387,24.343 T1.2
  other v1: 44.45,9.652 45.813,9.652 47.15,9.652 48.446,9.652 49.724,9.652 50.957,9.652 52.301,9.652 44.45,12.7 45.813,12.7 47.15,12.7 48.446,12.7 49.724,12.7 50.957,12.7 52.301,12.7 44.484,15.748 45.847,15.748 47.184,15.748 48.48,15.748 49.758,15.748 50.99,15.748 52.335,15.748
NetD14_1: D14.1 T2.2 T2.4 | length 16.1
  Top Layer w1: T2.2 31.369,24.114 32.655,25.4 41.417,25.4 42.906,26.889 D14.1@42.906,28.078
  other v1: 27.432,9.842 28.795,9.842 30.132,9.842 31.428,9.842 32.706,9.842 33.939,9.842 35.283,9.842 27.432,12.89 28.795,12.89 30.132,12.89 31.428,12.89 32.706,12.89 33.939,12.89 35.283,12.89 27.466,15.938 28.829,15.938 30.166,15.938 31.462,15.938 32.74,15.938 33.972,15.938 35.317,15.938
NetD15_1: D15.1 T3.2 T3.4 | length 21
  Top Layer w1: D15.1 48.748,27.104 50.177,25.675 62.871,25.675 65.094,23.452 65.094,21.774 T3.2
  other v1: 61.214,9.652 62.577,9.652 63.914,9.652 65.21,9.652 66.488,9.652 67.721,9.652 69.065,9.652 61.214,12.7 62.577,12.7 63.914,12.7 65.21,12.7 66.488,12.7 67.721,12.7 69.065,12.7 61.248,15.748 62.611,15.748 63.948,15.748 65.244,15.748 66.522,15.748 67.754,15.748 69.099,15.748
NetD16_1: D16.1 T4.2 T4.4 | length 21.2
  Top Layer w1: T4.2 14.351,24.765 18.022,28.436 D16.1
  other v1: 10.414,9.906 11.777,9.906 13.114,9.906 14.41,9.906 15.688,9.906 16.921,9.906 18.265,9.906 10.414,12.954 11.777,12.954 13.114,12.954 14.41,12.954 15.688,12.954 16.921,12.954 18.265,12.954 10.448,16.002 11.811,16.002 13.148,16.002 14.444,16.002 15.722,16.002 16.954,16.002 18.299,16.002
NetD17_1: D17.1 F1.2 J1.15 | length 7.2
  Bottom Layer w1: J1.15 F1.2@64.275,76.454 ; D17.1@64.125,72.812 64.275,72.962 F1.2@64.275,76.454 ; F1.2 F1.2@64.275,76.454
NetF1_1: "EXT PS.2" F1.1 | length 3.2
  Bottom Layer w1: F1.1@67.475,76.5 67.498,76.477 70.589,76.477 70.612,76.454
NetIC1_3: IC1.3 R18.2 R19.2 | length 6.2
  Bottom Layer w0.254: R18.2 R19.2 14.405,67.338 15.012,67.945 IC1.3
NetIC1_6: IC1.6 IC1.7 | length 1.3
  Bottom Layer w0.254: IC1.6 IC1.7
NetIC2_1: IC2.1 R7.1 | length 2.1
  Bottom Layer w0.254: R7.1 63.24,38.635 IC2.1
NetIC2_2: IC2.2 R9.2 T1.3 | length 30.1
  Bottom Layer w0.254: R9.2 66.04,30.734 66.04,38.717 64.752,40.005 IC2.2
  Bottom Layer w0.8: T1.3 R9.2@56.896,21.717
NetIC2_3: IC2.3 U1.1 | length 64
  Top Layer w0.254: v2(21.574,57.069) 22.036,57.531 61.468,57.531 64.897,54.102 v2(64.897,43.942)
  Bottom Layer w0.254: U1.1 16.274,57.048 21.553,57.048 v2(21.574,57.069) ; IC2.3 63.815,41.275 64.897,42.357 v2(64.897,43.942)
NetIC2_5: IC2.5 U1.13 | length 82.7
  Top Layer w0.254: v2(12.271,49.353) 13.377,48.248 18.363,48.248 19.899,49.784 19.899,57.11 21.463,58.674 61.875,58.674 66.04,54.509 v2(66.04,43.942)
  Bottom Layer w0.254: U1.13 10.687,52.46 11.573,52.46 12.274,51.76 12.274,49.357 v2(12.271,49.353) ; v2(66.04,43.942) 67.437,42.545 IC2.5
NetIC2_6: IC2.6 R11.2 T3.3 | length 29
  Bottom Layer w0.254: IC2.6 72.216,41.275 73.152,40.339 73.152,21.717 R11.2
  Bottom Layer w0.8: T3.3 R11.2@73.152,21.717
NetIC2_7: IC2.7 R14.1 | length 2.4
  Bottom Layer w0.254: IC2.7 71.023,40.005 R14.1
NetIC3_1: IC3.1 R8.1 | length 3.3
  Bottom Layer w0.254: R8.1 14.359,42.247 14.824,41.783 IC3.1
NetIC3_2: IC3.2 R10.2 T2.3 | length 40
  Bottom Layer w0.254: IC3.2 17.01,40.513 17.784,39.739 17.784,29.715 27.814,19.685 31.987,19.685 33.909,21.607 T2.3
  Bottom Layer w0.8: T2.3 39.375,21.907 39.413,21.945 39.979,21.945 R10.2@40.132,22.098
NetIC3_3: IC3.3 U1.6 | length 18.1
  Bottom Layer w0.254: IC3.3 14.283,39.243 13.462,40.064 13.462,44.748 14.824,46.11 14.824,53.127 15.474,53.777 U1.6
NetIC3_5: IC3.5 U1.19 | length 22.6
  Bottom Layer w0.254: IC3.5 11.66,37.973 12.894,39.207 12.894,45.356 14.097,46.559 14.097,53.901 11.638,56.36 10.687,56.36 U1.19
NetIC3_6: IC3.6 R12.2 T4.3 | length 27.4
  Bottom Layer w0.254: IC3.6 9.973,39.243 9.8,39.07 9.8,39.019 9.056,38.275 9.056,30.02 16.891,22.185 T4.3
  Bottom Layer w0.8: T4.3 16.954,22.034 22.796,22.034 R12.2@22.86,22.098
NetIC3_7: IC3.7 R15.1 | length 2.5
  Bottom Layer w0.254: R15.1 8.071,40.513 IC3.7
NetR4_2: R4.2 U1.3 | length 2
  Bottom Layer w0.254: U1.3 R4.2
NetR5_2: R5.2 U1.8 | length 2.4
  Bottom Layer w0.254: U1.8 17.724,52.477 18.299,53.052 R5.2
NetR6_2: R6.2 U1.11 | length 1.9
  Bottom Layer w0.254: R6.2 8.861,51.177 U1.11
NetR7_2: R7.2 T1.1 | length 28.3
  Bottom Layer w0.254: T1.1 45.847,23.368 47.879,25.4 57.117,25.4 64.84,33.123 R7.2
NetR8_2: R8.2 T2.1 | length 28.3
  Bottom Layer w0.254: R8.2 17.545,43.899 19.991,41.453 19.991,30.745 T2.1
NetR13_2: R13.2 U1.17 | length 1.9
  Bottom Layer w0.254: R13.2 8.844,55.077 U1.17
NetR14_2: R14.2 T3.1 | length 20.1
  Bottom Layer w0.254: T3.1 62.611,24.231 71.112,32.732 R14.2
NetR15_2: R15.2 T4.1 | length 19.1
  Bottom Layer w0.254: R15.2 7.182,38.024 7.182,26.6 T4.1
NetU1_5: "WP pull up.2" U1.5 | length 8
  Bottom Layer w0.254: 12.394,59.944 12.394,56.833 14.8,54.427 U1.5
SCL: J1.9 R17.1 U1.14 | length 62.2
  Top Layer w0.254: v2(13.335,49.353) 17.294,49.353 18.591,50.651 18.591,60.895 20.943,63.246 41.34,63.246 45.593,67.499 J1.9
  Bottom Layer w0.254: R17.1 U1.14 11.902,53.127 13.335,51.694 v2(13.335,49.353)
SDA: J1.8 R16.1 U1.9 | length 52.5
  Top Layer w0.254: v2(17.212,50.332) 17.212,61.825 20.038,64.65 40.334,64.65 43.053,67.369 J1.8
  Bottom Layer w0.254: U1.9 17.046,51.827 17.621,51.252 R16.1@18.299,51.252 ; v2(17.212,50.332) 17.7,50.82 18.001,50.82 18.299,51.118 R16.1
Vps: "EXT PS.1" B1.1 B7.1 C2.1 C3.1 C4.1 D1.2 D2.2 D3.2 D4.2 IC1.8 IC2.8 IC3.8 R18.1 | length 89
  Top Layer w0.254: 6.795,64.954 6.865,65.024 ; 7.309,66.04 8.89,66.04 9.352,65.578 v2(9.352,65.024)
  Top Layer w0.5: B7.1 7.297,68.195 7.309,68.183 ; 6.795,64.954 3.264,61.422 3.264,48.49 7.855,43.899 v2(8.732,43.899) 23.452,43.899 25.273,45.72 25.273,51.781 27.269,53.777 32.519,53.777 32.619,53.877 ; 6.865,65.024 7.309,65.468 7.309,66.04 7.309,68.183 ; v2(7.309,70.311) 7.309,68.183
  Top Layer w0.8: D4.2 31.222,50.688 D4.2@31.722,51.188 ; D1.2 D1.2@37.064,44.349 ; D2.2@42.406,51.117 42.906,50.617 D2.2 D2.2@42.941,50.452 ; 45.593,53.34 45.974,52.959 ; D3.2@48.713,50.452 D3.2
  Bottom Layer w0.254: v2(9.352,65.024) R18.1
  Bottom Layer w0.5: v2(7.309,70.311) C3.1 8.62,70.435 10.712,70.435 IC1.8 ; v2(8.732,43.899) C2.1 10.162,41.833 10.212,41.783 IC3.8 ; IC2.8 68.79,38.735 68.84,38.685 C4.1 v2(68.84,35.221)
  Bottom Layer w1: B1.1 70.612,73.914
  other v3: 36.925,45.835 37.815,45.835 38.896,46.478 40.044,46.484 41.151,46.484 42.406,46.478 43.553,46.484 44.661,46.484 45.593,50.455 46.483,50.455 45.593,51.562 46.483,51.562
pads on no net: J1.1 J1.2 J1.3 J1.6 J1.7 J1.10 J1.11 J1.13 J2.1 J2.2 J2.3 J2.5 J2.6 J2.9 J2.11 J2.13 J2.14 J2.15

## Polygon pours and split planes (outlines as drawn)
GND on Top Layer "GND_L01_P021" (solid, pour order 21): 3.421,0 76.564,0 ccw(c76.564,3.436) 80,3.436 80,76.551 ccw(c76.551,76.551) 76.551,80 3.387,80 ccw(c3.387,76.613) 0,76.613 0,3.421 ccw(c3.421,3.421)
NetD13_1 on Top Layer "NETD13_1_L01_P009" (solid, pour order 9): 43.099,1.76 43.099,17.231 46.413,17.231 47.481,18.299 47.481,22.377 47.949,22.844 49.038,22.844 49.436,22.446 49.436,18.132 50.338,17.231 53.767,17.231 53.767,1.991 53.536,1.76
NetD14_1 on Top Layer "NETD14_1_L01_P008" (solid, pour order 8): 26.081,1.95 26.081,17.4 29.395,17.4 30.463,18.468 30.463,22.546 30.931,23.013 32.02,23.013 32.418,22.615 32.418,18.301 33.32,17.4 36.749,17.4 36.749,1.95
NetD15_1 on Top Layer "NETD15_1_L01_P010" (solid, pour order 10): 59.863,1.76 59.863,17.231 63.177,17.231 64.245,18.299 64.245,22.377 64.713,22.844 65.797,22.844 66.2,22.441 66.2,18.132 67.102,17.231 70.531,17.231 70.531,1.991 70.3,1.76
NetD16_1 on Top Layer "NETD16_1_L01_P007" (solid, pour order 7): 9.017,2.014 9.017,17.526 12.332,17.526 13.4,18.594 13.4,22.672 13.867,23.14 14.956,23.14 15.354,22.741 15.354,18.428 16.256,17.526 19.685,17.526 19.685,2.014
Vps on Top Layer "Top Layer-No Net" (solid, pour order 4): 32.312,52.324 41.91,52.324 43.942,52.324 47.77,52.324 49.802,52.324 55.118,52.324 57.534,49.908 57.534,43.048 59.967,40.616 66.826,40.616 68.04,39.402 68.04,34.852 68.348,34.544 69.342,34.544 69.596,34.798 69.596,39.422 70.79,40.616 74.42,40.616 76.5,42.696 76.5,67.264 74.422,69.342 69.596,69.342 68.73,68.476 68.73,66.364 69.562,65.532 73.152,65.532 74.422,64.262 74.422,44.248 73.1,42.926 61.468,42.926 60.452,43.942 60.452,50.8 56.275,54.977 30.253,54.977 29.819,54.543 29.819,52.784 30.28,52.324
GND on Bottom Layer "GND_L02_P019" (solid, pour order 19): 3.421,0 76.564,0 ccw(c76.564,3.436) 80,3.436 80,76.551 ccw(c76.551,76.551) 76.551,80 3.387,80 ccw(c3.387,76.613) 0,76.613 0,3.421 ccw(c3.421,3.421)
NetD16_1 on Bottom Layer "NETD16_1_L02_P018" (solid, pour order 18): 9.017,2.286 9.017,17.526 12.332,17.526 13.4,18.594 13.4,22.672 13.867,23.14 14.956,23.14 15.354,22.741 15.354,18.428 16.256,17.526 19.685,17.526 19.685,2.286 19.677,2.278 19.67,2.286
NetD14_1 on Bottom Layer "NETD14_1_L02_P017" (solid, pour order 17): 26.081,2.16 26.081,17.4 29.395,17.4 30.463,18.468 30.463,22.546 30.931,23.013 32.02,23.013 32.418,22.615 32.418,18.301 33.32,17.4 36.749,17.4 36.749,2.16 36.741,2.152 36.734,2.16
NetD15_1 on Bottom Layer "NETD15_1_L02_P016" (solid, pour order 16): 59.863,1.76 59.863,17.231 63.177,17.231 64.245,18.299 64.245,22.377 64.713,22.844 65.797,22.844 66.2,22.441 66.2,18.132 67.102,17.231 70.531,17.231 70.531,1.76
NetD13_1 on Bottom Layer "NETD13_1_L02_P014" (solid, pour order 14): 43.099,1.991 43.099,17.231 46.413,17.231 47.481,18.299 47.481,22.377 47.949,22.844 49.038,22.844 49.436,22.446 49.436,18.132 50.338,17.231 53.767,17.231 53.767,1.991 53.759,1.983 53.752,1.991
NetD15_1 on Bottom Layer "NETD15_1_L02_P013" (solid, pour order 13): 59.863,1.991 59.863,17.231 63.177,17.231 64.245,18.299 64.245,22.377 64.713,22.844 65.797,22.844 66.2,22.441 66.2,18.132 67.102,17.231 70.531,17.231 70.531,1.991 70.523,1.983 70.516,1.991
NetD13_1 on Bottom Layer "NETD13_1_L02_P012" (solid, pour order 12): 43.099,1.76 43.099,17.231 46.413,17.231 47.481,18.299 47.481,22.377 47.949,22.844 49.038,22.844 49.436,22.446 49.436,18.132 50.338,17.231 53.767,17.231 53.767,1.76
NetD14_1 on Bottom Layer "NETD14_1_L02_P011" (solid, pour order 11): 26.081,1.95 26.081,17.4 29.395,17.4 30.463,18.468 30.463,22.546 30.931,23.013 32.02,23.013 32.418,22.615 32.418,18.301 33.32,17.4 36.749,17.4 36.749,1.95
NetD16_1 on Bottom Layer "NETD16_1_L02_P006" (solid, pour order 6): 9.017,2.014 9.017,17.526 12.332,17.526 13.4,18.594 13.4,22.672 13.867,23.14 14.956,23.14 15.354,22.741 15.354,18.428 16.256,17.526 19.685,17.526 19.685,2.014
no net on Top Solder "NONET_L-01_P-001" (solid): 59.788,2.061 59.788,17.192 59.897,17.301 70.456,17.301 70.456,2.029 70.425,2.061 59.834,2.061
no net on Top Solder "NONET_L-01_P-001" (solid): 43.053,2.032 43.053,17.164 43.161,17.272 53.721,17.272 53.721,2 53.689,2.032 43.099,2.032
no net on Top Solder "NONET_L-01_P-001" (solid): 9.017,2.286 9.017,17.418 9.125,17.526 19.685,17.526 19.685,2.254 19.653,2.286 9.063,2.286
no net on Top Solder "NONET_L-01_P-001" (solid): 26.035,2.222 26.035,17.354 26.143,17.462 36.703,17.462 36.703,2.19 36.671,2.222 26.081,2.222
no net on Bottom Solder "NONET_L-01_P-001" (solid): 59.817,2.032 59.817,17.164 59.925,17.272 70.485,17.272 70.485,2 70.453,2.032 59.863,2.032
no net on Bottom Solder "NONET_L-01_P-001" (solid): 43.053,2.032 43.053,17.164 43.161,17.272 53.721,17.272 53.721,2 53.689,2.032 43.099,2.032
no net on Bottom Solder "NONET_L-01_P-001" (solid): 26.035,2.222 26.035,17.354 26.143,17.462 36.703,17.462 36.703,2.19 36.671,2.222 26.081,2.222
no net on Bottom Solder "NONET_L-01_P-001" (solid): 9.017,2.286 9.017,17.418 9.125,17.526 19.685,17.526 19.685,2.254 19.653,2.286 9.063,2.286

## Other copper
Top Layer:
  region net NetD4_1: 32.175,48.768 32.175,43.084 32.139,43.048 32.134,43.053 30.28,43.053 30.28,48.768
  region net NetD2_1: 36.195,49.403 36.195,51.562 38.444,51.562 41.238,48.768 43.795,48.768 43.815,48.748 43.815,47.625 40.259,47.625 38.48,49.404 36.068,49.404
  region net Vps: 36.195,45.989 37.323,47.117 44.376,47.117 44.884,47.625 44.884,52.784 46.749,52.784 46.99,52.543 46.99,46.942 45.768,45.72 38.602,45.72 37.922,45.04 37.922,43.066 36.195,43.066
  region net NetD6_1: 37.973,47.625 37.973,48.748 34.351,48.748 33.476,47.872 33.476,30.392 34.403,29.464 37.964,29.464 37.964,31.75 35.887,31.75 35.078,32.559 35.078,47.219 35.484,47.625 36.142,47.625
  region net NetD10_1: 36.195,28.956 38.546,28.956 41.34,31.75 43.815,31.75 43.815,29.464 41.3,29.464 39.649,27.813 36.195,27.813
  region net NetD5_1: 36.195,35.814 38.174,35.814 39.197,36.838 39.197,43.872 40.665,45.339 43.762,45.339 43.762,43.106 43.815,43.053 43.81,43.048 41.733,43.048 40.665,41.98 40.665,36.165 39.351,34.852 36.195,34.852 36.195,35.741
  region net NetD12_1: 32.175,35.741 32.175,30.057 32.139,30.021 32.134,30.026 30.28,30.026 30.28,35.741
  region net NetD11_1: 49.701,35.741 49.701,29.591 47.806,29.591 47.806,35.741
  region net NetD1_1: 37.964,42.429 37.964,36.322 36.068,36.322 36.068,42.429
  region net NetD9_1: 43.859,42.429 43.859,36.322 41.964,36.322 41.964,42.429
  region net NetD8_1: 32.175,42.429 32.175,36.322 30.28,36.322 30.28,42.429
  region net NetD7_1: 49.701,42.429 49.701,36.322 47.806,36.322 47.806,42.429
  region net NetD3_1: 49.701,48.768 49.701,43.084 49.665,43.048 49.66,43.053 47.806,43.053 47.806,48.768
  region net Vps: 47.741,52.616 47.741,49.397 49.802,49.397 49.802,52.587 49.637,52.753 47.877,52.753
  region net Vps: 41.899,52.546 41.899,49.326 43.923,49.326 43.923,52.537 43.931,52.546 43.795,52.682 42.035,52.682
  region net Vps: 30.28,52.324 30.28,49.353 32.282,49.353 32.303,49.374 32.303,52.315 32.312,52.324 32.175,52.46 30.416,52.46
Bottom Layer:
  region net Vps: 36.195,45.989 37.323,47.117 44.376,47.117 44.884,47.625 44.884,52.784 46.749,52.784 46.99,52.543 46.99,46.942 45.768,45.72 38.602,45.72 37.922,45.04 37.922,43.066 36.195,43.066
  region net NetD5_1: 36.195,35.814 38.174,35.814 39.197,36.838 39.197,43.872 40.665,45.339 43.762,45.339 43.762,43.106 43.815,43.053 43.81,43.048 41.733,43.048 40.665,41.98 40.665,36.165 39.351,34.852 36.195,34.852 36.195,35.741
  region net NetD10_1: 36.195,28.956 38.546,28.956 41.34,31.75 43.815,31.75 43.815,29.464 41.3,29.464 39.649,27.813 36.195,27.813
  region net NetD2_1: 36.195,49.403 36.195,51.562 38.444,51.562 41.238,48.768 43.795,48.768 43.815,48.748 43.815,47.625 40.259,47.625 38.48,49.404 36.068,49.404
  region net NetD3_1: 49.701,48.768 49.701,43.084 49.665,43.048 49.66,43.053 47.806,43.053 47.806,48.768
  region net NetD11_1: 49.701,35.741 49.701,29.591 47.806,29.591 47.806,35.741
  region net NetD9_1: 43.859,42.429 43.859,36.322 41.964,36.322 41.964,42.429
  region net NetD7_1: 49.701,42.429 49.701,36.322 47.806,36.322 47.806,42.429
  region net NetD1_1: 37.964,42.429 37.964,36.322 36.068,36.322 36.068,42.429
  region net NetD12_1: 32.175,35.741 32.175,30.057 32.139,30.021 32.134,30.026 30.28,30.026 30.28,35.741
  region net NetD8_1: 32.175,42.429 32.175,36.322 30.28,36.322 30.28,42.429
  region net NetD4_1: 32.175,48.768 32.175,43.084 32.139,43.048 32.134,43.053 30.28,43.053 30.28,48.768
  region net NetD6_1: 37.973,47.625 37.973,48.748 34.351,48.748 33.476,47.872 33.476,30.392 34.403,29.464 37.964,29.464 37.964,31.75 35.887,31.75 35.218,32.419 35.218,47.36 35.484,47.625 36.142,47.625

## Silkscreen, mask and mechanical layers (free items; w line width, h text height)
Top Overlay:
  lines w0.4: 29.129,26.787 29.129,51.496 29.129,52.737 51.084,52.737 51.084,26.787 29.129,26.787
  text "LED MATRIX" at 35.234,53.785 h1
Bottom Overlay:
  drawing of 24 lines, arcs and shapes, not listed
  text "A0" at 33.582,78.236 h1
  text "A1" at 35.942,78.186 h1
  text "SDA" at 44.007,78.186 h1
  text "SCL" at 47.006,78.186 h1
  text "5V" at 53.95,78.186 h1
  text "VIN" at 62.053,78.186 h1
  text "Temp sens" at 18.517,73.46 h1 r90
  text "PhotoD" at 1.705,71.936 h1 r90
  text "USB" at 26.597,68.653 h1
  text "ARDUINO NANO" at 53.548,67.229 h2
  text "+5V" at 21.024,66.199 h1 r90
  text "D5" at 43.615,59.308 h1 r90
  text "D3" at 48.586,59.308 h1 r90
  text "D9" at 33.402,59.274 h1 r90
  text "D6" at 41.038,59.274 h1 r90
  text "LED MATRIX" at 44.504,53.667 h1
Top Solder:
  region: 37.973,47.625 37.973,48.748 34.351,48.748 33.476,47.872 33.476,30.392 34.403,29.464 37.964,29.464 37.964,31.233 37.973,31.242 37.973,31.741 37.964,31.75 35.887,31.75 35.078,32.559 35.078,47.219 35.484,47.625
  region: 30.28,48.768 32.175,48.768 32.157,48.75 32.157,43.066 30.293,43.066 30.28,43.053
  region: 30.28,42.429 32.175,42.429 32.175,36.322 30.28,36.322
  region: 41.964,42.429 43.859,42.429 43.859,36.322 41.964,36.322
  region: 30.28,35.741 32.175,35.741 32.175,30.026 30.28,30.026
  region: 36.122,42.429 38.017,42.429 38.017,36.322 36.122,36.322
  region: 47.806,42.429 49.701,42.429 49.701,36.322 47.806,36.322
  region: 47.806,48.768 49.701,48.768 49.701,43.053 47.806,43.053
  region: 36.195,43.066 37.922,43.066 37.922,45.04 38.602,45.72 45.768,45.72 46.99,46.942 46.99,52.315 44.884,52.315 44.884,47.625 44.376,47.117 37.323,47.117 36.195,45.989
  region: 36.195,35.814 38.374,35.814 39.197,36.637 39.197,43.872 40.665,45.339 43.762,45.339 43.762,43.106 43.703,43.048 41.733,43.048 40.632,41.947 40.632,36.132 39.351,34.852 36.195,34.852 36.195,35.778
  region: 36.195,27.813 36.195,28.956 38.546,28.956 41.34,31.75 43.815,31.75 43.815,29.464 41.503,29.464 41.3,29.464 39.649,27.813
  region: 36.195,49.403 36.195,51.562 38.444,51.562 41.238,48.768 43.795,48.768 43.795,47.645 43.815,47.625 40.259,47.625 38.48,49.404 38.479,49.403
  region: 47.806,35.741 49.701,35.741 49.701,29.634 47.806,29.634
Bottom Solder:
  region: 36.195,49.403 36.195,51.562 38.444,51.562 41.238,48.768 43.795,48.768 43.795,47.645 43.815,47.625 40.259,47.625 38.48,49.404 38.479,49.403
  region: 36.195,27.813 36.195,28.956 38.546,28.956 41.34,31.75 43.815,31.75 43.815,29.464 41.503,29.464 41.3,29.464 39.649,27.813
  region: 36.195,35.814 38.374,35.814 39.197,36.637 39.197,43.872 40.665,45.339 43.762,45.339 43.762,43.106 43.703,43.048 41.733,43.048 40.632,41.947 40.632,36.132 39.351,34.852 36.195,34.852 36.195,35.778
  region: 36.195,43.066 37.922,43.066 37.922,45.04 38.602,45.72 45.768,45.72 46.99,46.942 46.99,52.315 44.884,52.315 44.884,47.625 44.376,47.117 37.323,47.117 36.195,45.989
  region: 37.973,47.625 37.973,48.748 34.351,48.748 33.476,47.872 33.476,30.392 34.403,29.464 37.964,29.464 37.964,31.233 37.973,31.242 37.973,31.741 37.964,31.75 35.887,31.75 35.218,32.419 35.218,47.36 35.484,47.625
  region: 47.806,35.741 49.701,35.741 49.701,29.634 47.806,29.634
  region: 47.806,48.768 49.701,48.768 49.701,43.053 47.806,43.053
  region: 47.806,42.429 49.701,42.429 49.701,36.322 47.806,36.322
  region: 36.122,42.429 37.964,42.429 37.964,36.322 36.122,36.322
  region: 30.28,35.741 32.175,35.741 32.175,30.057 30.28,30.057
  region: 41.964,42.429 43.859,42.429 43.859,36.322 41.964,36.322
  region: 30.28,42.429 32.175,42.429 32.175,36.322 30.28,36.322
  region: 30.28,48.768 32.175,48.768 32.157,48.75 32.157,43.066 30.293,43.066 30.28,43.053
Board:
  the board outline again, w0.2

## Dimensions
60.833,61.214 to 60.833,76.454 on Bottom Courtyard